# Altium PCB PCB2.PcbDoc
Units mm, origin at the board's own origin, x right, y up, seen from the top; angles counter-clockwise.
Board outline 20.07 x 15.75 mm, 2 copper layers (Top Layer, Bottom Layer); 6 components, 8 nets, 22 pads, 7 vias.
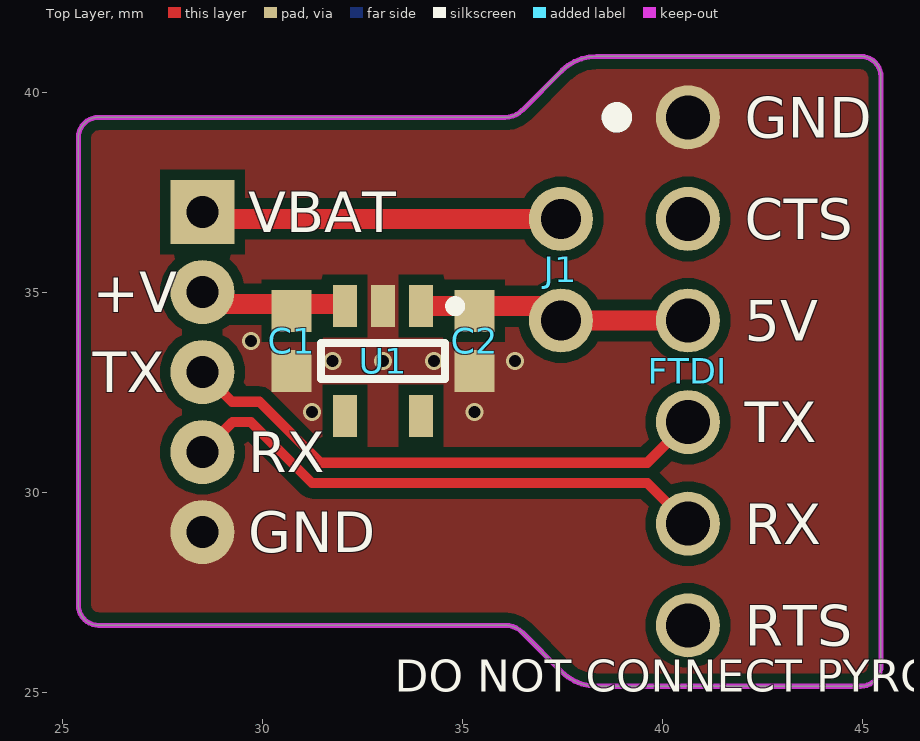
[diagram p0: Top Layer view]
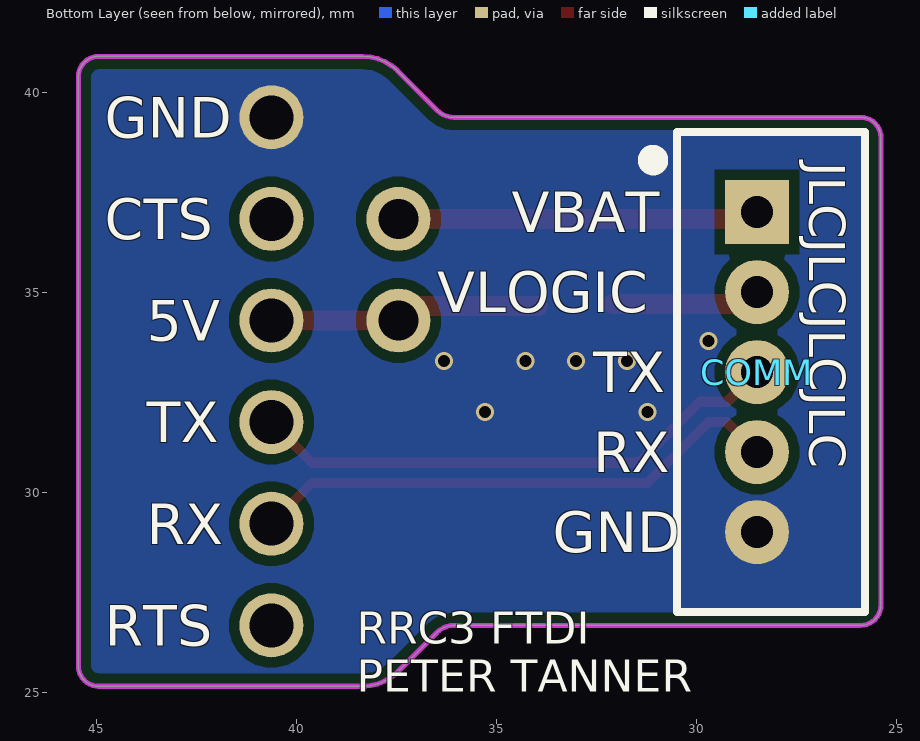
[diagram p1: Bottom Layer view, seen from below]
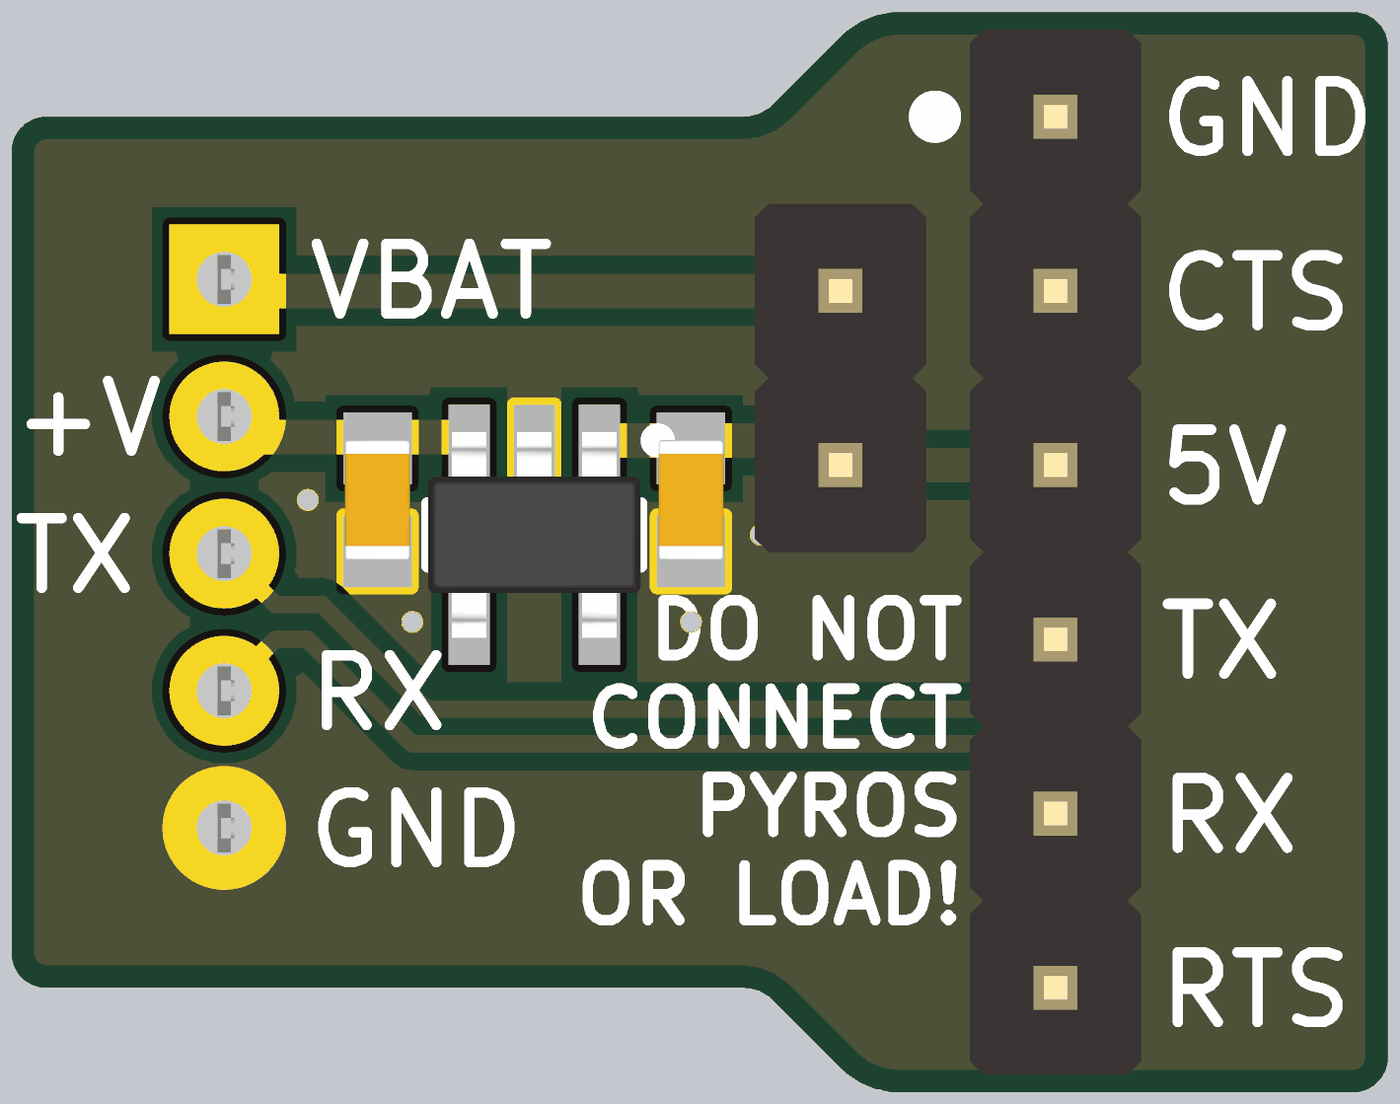
[diagram p2: 3D render of the assembled board from above, using the file's embedded part models]

## Layer stack, top to bottom
Top Solder: solder mask 0.0102, Solder Resist, Dk 3.5
Top Layer: signal copper 0.0356
Dielectric 1: dielectric 0.32, FR-4, Dk 4.8
Bottom Layer: signal copper 0.0356
Bottom Solder: solder mask 0.0102, Solder Resist, Dk 3.5

## Board outline
25.908,26.67 cw(c25.908,27.178) 25.4,27.178 25.4,38.862 cw(c25.908,38.862) 25.908,39.37 36.068,39.37 ccw(c36.068,39.983) 36.502,39.55 37.487,40.535 cw(c38.354,39.668) 38.354,40.894 44.958,40.894 cw(c44.958,40.386) 45.466,40.386 45.466,25.654 cw(c44.958,25.654) 44.958,25.146 38.354,25.146 cw(c38.354,26.372) 37.487,25.505 36.502,26.49 ccw(c36.068,26.057) 36.068,26.67

## Design rules (kind name [scope] priority, off if disabled: settings)
Clearance [All] p1: gap=0.254 ignorepadtopadclearanceinfootprint=FALSE except(0: Arc-Hole Track-Hole SMDPad-Hole THPad-Hole Via-Hole Fill-Hole Poly-Hole Region-Hole Text-Hole)
PolygonConnect [All] p1: connectstyle=Direct reliefconductorwidth=0.254 reliefentries=4 polygonreliefangle="90 Angle" airgapwidth=0.254
RoutingVias [All] p1: holewidth=0.711 width=1.27 viastyle="Through Hole" minholewidth=0.711 minwidth=1.27 maxholewidth=0.711 maxwidth=1.27
SolderMaskExpansion [All] p1: expansion=0.102 istentingtop=FALSE
Width [All] p1: maxlimit=10 minlimit=0.254 preferedwidth=0.254
30 further rules are at their usual default settings.

## Components (designator, comment, footprint, x,y, rotation, side; value= is the part's Value field where it differs from the comment)
C1 "C0603C105K8PACTU" CAPC1608X10N 30.734,33.782 r90 top value=1uF
C2 "C0603C105K8PACTU" CAPC1608X10N 35.306,33.782 r90 top value=1uF
COMM "DF3-5S-2DSA(25)" DF3-5S-2DSA(25)-Footprint-1 28.5,33 r0 bottom
FTDI "68000-406HLF" 68000-406HLF-Footprint-1 40.64,39.37 r270 top
J1 "22-28-4020" 22-28-4020-Footprint-1 37.465,34.29 r90 top
U1 "AP7370-33WW-7" SOT95P285X140-5N 33.02,33.274 r270 top

## Footprints (in the part's own frame and the unit in brackets; to place one, negate y for a bottom-side part, rotate by r counter-clockwise, add the part's x,y. Pads: shape width x height; smd on the part's side, far side on the other; paste and mask are expansions set on the pad)
22-28-4020-Footprint-1 [mm]
  round 1.6 hole 1: 1(0,0) 2(2.54,0)
  body extent -1.27,-1.27 3.81,1.23, height 8.38
68000-406HLF-Footprint-1 [mm]
  round 1.6 hole 1.1: 1(0,0) 2(2.54,0) 3(5.08,0) 4(7.62,0) 5(10.16,0) 6(12.7,0)
  body extent -1.27,-1.27 13.97,1.23, height 8.38
CAPC1608X10N [mm] "Chip Capacitor, 2-Leads, Body 1.60x0.80mm, IPC Medium Density"
  rect 1.05x1 smd: 1(-0.75,0) 2(0.75,0)
  body extent -0.87,-0.48 0.87,0.48, height 0.95
DF3-5S-2DSA(25)-Footprint-1 [mm]
  rect 1.6x1.6 hole 0.8: 1(0,-4)
  round 1.6 hole 0.8: 2(0,-2) 3(0,0) 4(0,2) 5(0,4)
  silkscreen extent -2.7,-6 2.73,6, body extent -2.63,-6 1.95,6, height 5.91
SOT95P285X140-5N [mm] "SOT23, 5-Leads, Body 3.00x2.85mm, Pitch 0.95mm, IPC Medium Density"
  rect 1.05x0.6 smd: 1(-1.375,0.95) 2(-1.375,0) 3(-1.375,-0.95) 4(1.375,-0.95) 5(1.375,0.95)
  silkscreen extent -1.5,-1.55 0.45,1.93, body extent -1.5,-1.55 1.5,1.55, height 1.4

## Part data
C1 C2: library part CMP-00045-1, "Cap Ceramic 1uF 10V X5R 10% SMD 0603 85°C Paper T/R", Capacitance=1uF, Case Code (Imperial)=0603, Case Code (Metric)=1608, Dielectric=X5R, Dielectric Material=Ceramic, Max Operating Temperature=85°C, Min Operating Temperature=-55°C, Package Quantity=1, Tolerance=10%, Voltage=10V, Case/Package=0603, Depth=0.8mm, Height=0.8mm, Lead Free="Lead Free", Length=1.6mm, Mount="Surface Mount", Number of Pins=2, Packaging="Tape and Reel", Radiation Hardening=No, REACH SVHC="No SVHC", Termination=SMD/SMT, Thickness=0.035inch, Voltage Rating=10V, Voltage Rating (DC)=10V, Weight=7.1E-05oz, Width=0.031inch
COMM: library part CMP-00604-1, "Board-to-Cable Connector (Terminal 1 Row Type) with 2-mm Pitch - DF3 Series (HIROSE ELECTRIC)", Color=Black, Current Rating=3A, Package Quantity=40, Voltage Rating=250V, Connector Type=Receptacle, Contact Gender=Female, Contact Material=Bronze, Contact Plating=Tin, Contact Type="Female Socket", Fastening Type=Ramp, Mounting Technology="Through Hole", Number of Contacts=5, Number of Positions=5, Number of Rows=1, Packaging=Rail/Tube, Pitch=2mm, Radiation Hardening=No, Series=DF3, Termination=Solder
FTDI: library part CMP-00021-3, "CONN HEADER 6POS .100 STR TIN", Color=Black, Current Rating=3A, Flammability Rating="UL94 V-0", Insulation Resistance=5GR, Max Operating Temperature=125°C, Max Voltage Rating (AC)=1.5kV, Min Operating Temperature=-65°C, Package Quantity=100, Connector Type="Male Pin", Contact Gender=Male, Contact Material=Bronze, Contact Mating Length=0.23inch, Contact Plating=Tin, Contact Post Length=2.41mm, Depth=2.41mm, Gender=Male, Housing Color=Black, Housing Material=Thermoplastic, Length=15.24mm, Mount="Through Hole", Number of Contacts=6, Number of Positions=6, Number of Rows=1, Orientation=Straight, Packaging=Bulk, Pitch=2.54mm, Radiation Hardening=No, REACH SVHC="No SVHC", Termination=Solder, Voltage Rating=1.5kV
J1: library part CMP-00157-4, "KK 254 Breakaway Header, Vertical, 2 Circuits, Tin (Sn) Plating, Mating Pin Length 6.09mm 2 POS", Color=Black, Contact Resistance=20mR, Current Rating=4A, Flammability Rating="UL94 V-0", Max Operating Temperature=75°C, Max Voltage Rating (AC)=250V, Min Operating Temperature=0°C, Package Quantity=1, Connector Type="Male Pin", Contact Material=Brass,Bronze, Contact Mating Length=0.24inch, Contact Plating=Tin, Contact Type="Male Pin", Depth=2.49mm, Gender=Male, Glow Wire Compliant=Non-compliant, Housing Color=Black, Housing Material=Nylon, Lead Free="Lead Free", Max Voltage Rating (DC)=250V, Mount="Through Hole", Mounting Technology="Through Hole", Number of Circuits=2, Number of Contacts=2, Number of Positions=2, Number of Rows=1, Orientation=Straight, Packaging=Bulk, Pitch=2.54mm, Radiation Hardening=No, REACH SVHC=Unknown, Series="KK® 42375", Termination=Solder, Voltage Rating=250V, Voltage Rating (DC)=250V
U1: library part CMP-00571-1, "LDO Regulator Pos 3.3V 0.3A 5-Pin SOT-25 T/R", Case/Package=SOT-25, Max Operating Temperature=125°C, Max Supply Current=300uA, Max Supply Voltage=18V, Min Operating Temperature=-40°C, Min Output Voltage=3.3V, Output Current=300mA, Quiescent Current=2.5uA, Mounting Technology="Surface Mount", Number of Regulators=1, Output Configuration=Positive, Output Type=Fixed, Series=-

## Via types
v1: diameter 0.45, hole 0.3, Top Layer to Bottom Layer, tented both sides, 7 vias

## Nets (pads, with @x,y where several pads share a name; then routed paths per layer and width w, separated by ;. In a path a pad name is that pad's centre, name@x,y a point inside that pad or via, vN(x,y) a via of type N, cw(c..) or ccw(c..) an arc to the next point about the centre after c; other vN are vias at no path point)
+5V: C2.2 FTDI.3 J1.1 U1.1 | length 6.8
  Top Layer w0.5: U1.1 37.106,34.649 J1.1 FTDI.3
+VBAT: COMM.1 J1.2 | length 9
  Top Layer w0.5: COMM.1 28.67,36.83 J1.2
+VLOGIC: C1.2 COMM.2 U1.3 | length 3.7
  Top Layer w0.5: COMM.2 28.8,34.7 U1.3@32.1,34.7
CTS: FTDI.2
GND: C1.1 C2.1 COMM.5 FTDI.1 U1.2
  other v1: 31.242,32.004 35.306,32.004 31.75,33.274 33.02,33.274 34.29,33.274 36.322,33.274 29.718,33.782
RTS: FTDI.6
RX: COMM.4 FTDI.5 | length 13.5
  Top Layer w0.254: COMM.4 29.25,31.75 29.718,31.75 31.242,30.226 39.624,30.226 FTDI.5
TX: COMM.3 FTDI.4 | length 13.5
  Top Layer w0.254: COMM.3 29.242,32.258 29.928,32.258 31.452,30.734 39.624,30.734 FTDI.4
pads on no net: U1.4 U1.5

## Polygon pours and split planes (outlines as drawn)
GND on Bottom Layer "NONET_L-01_P-001" (solid, pour order 0): 25.654,39.116 25.654,26.924 36.322,26.924 37.846,25.4 45.212,25.4 45.212,40.64 37.846,40.64 36.322,39.116
GND on Top Layer "NONET_L-01_P-001" (solid, pour order 1): 25.654,39.116 25.654,26.924 36.322,26.924 37.846,25.4 45.212,25.4 45.212,40.64 37.846,40.64 36.322,39.116

## Keep-outs
Keep-Out Layer:
  the board outline again, w0.127

## Silkscreen, mask and mechanical layers (free items; w line width, h text height)
Top Overlay:
  circle w0.508: c38.862,39.37 r0.127
  text "GND" at 42.062,38.862 h1.02
  text "VBAT" at 29.652,36.492 h1.02
  text "CTS" at 42.062,36.322 h1.02
  text "+V" at 25.755,34.492 h1.02
  text "5V" at 42.062,33.782 h1.02
  text "TX" at 25.755,32.492 h1.02
  text "TX" at 42.062,31.242 h1.02
  text "RX" at 29.652,30.492 h1.02
  text "RX" at 42.062,28.702 h1.02
  text "GND" at 29.652,28.492 h1.02
  text "RTS" at 42.062,26.162 h1.02
  text "DO NOT CONNECT PYROS OR LOAD!" at 33.316,25.014 h0.8
Bottom Overlay:
  text "GND" at 44.806,38.862 h1.02
  text "JLCJLCJLCJLC" at 27.2,38.248 h0.9 r90
  text "VBAT" at 34.627,36.492 h1.02
  text "CTS" at 44.806,36.322 h1.02
  text "VLOGIC" at 36.489,34.492 h1.02
  text "5V" at 43.755,33.782 h1.02
  text "TX" at 32.595,32.492 h1.02
  text "TX" at 43.755,31.242 h1.02
  text "RX" at 32.595,30.492 h1.02
  text "RX" at 43.755,28.702 h1.02
  text "GND" at 33.611,28.492 h1.02
  text "RTS" at 44.806,26.162 h1.02
  text "RRC3 FTDI / PETER TANNER" at 38.5,25.014 h0.8